# Altium PCB SHDN-IMD-S00-V00-IMDDaughter.PcbDoc
Units mm, origin at the board's own origin, x right, y up, seen from the top; angles counter-clockwise.
Board outline 55.68 x 59.75 mm, 2 copper layers (Top Layer, Bottom Layer); 69 components, 37 nets, 212 pads, 38 vias.
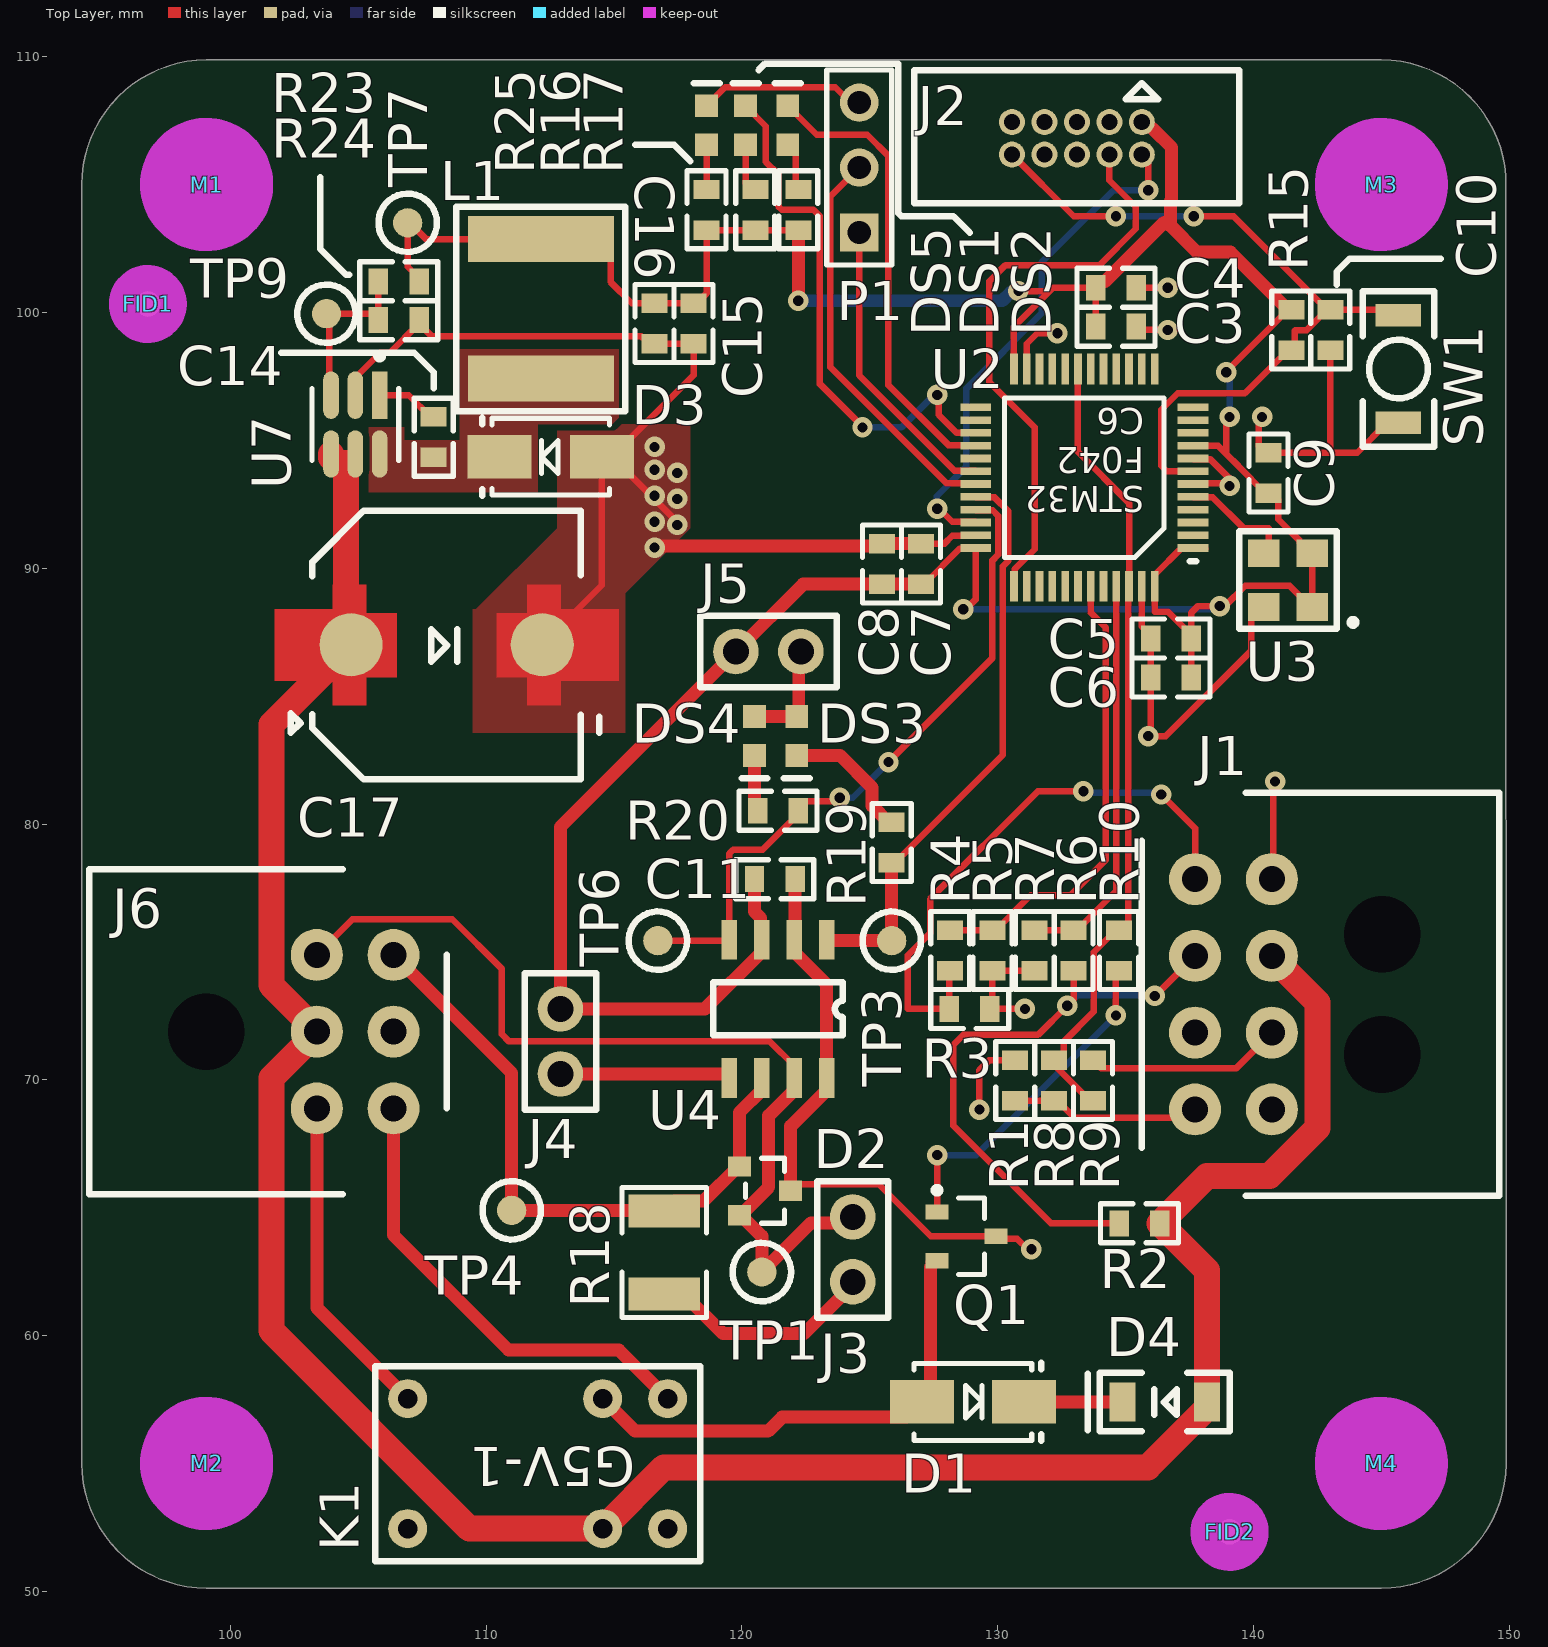
[diagram p0: Top Layer view]
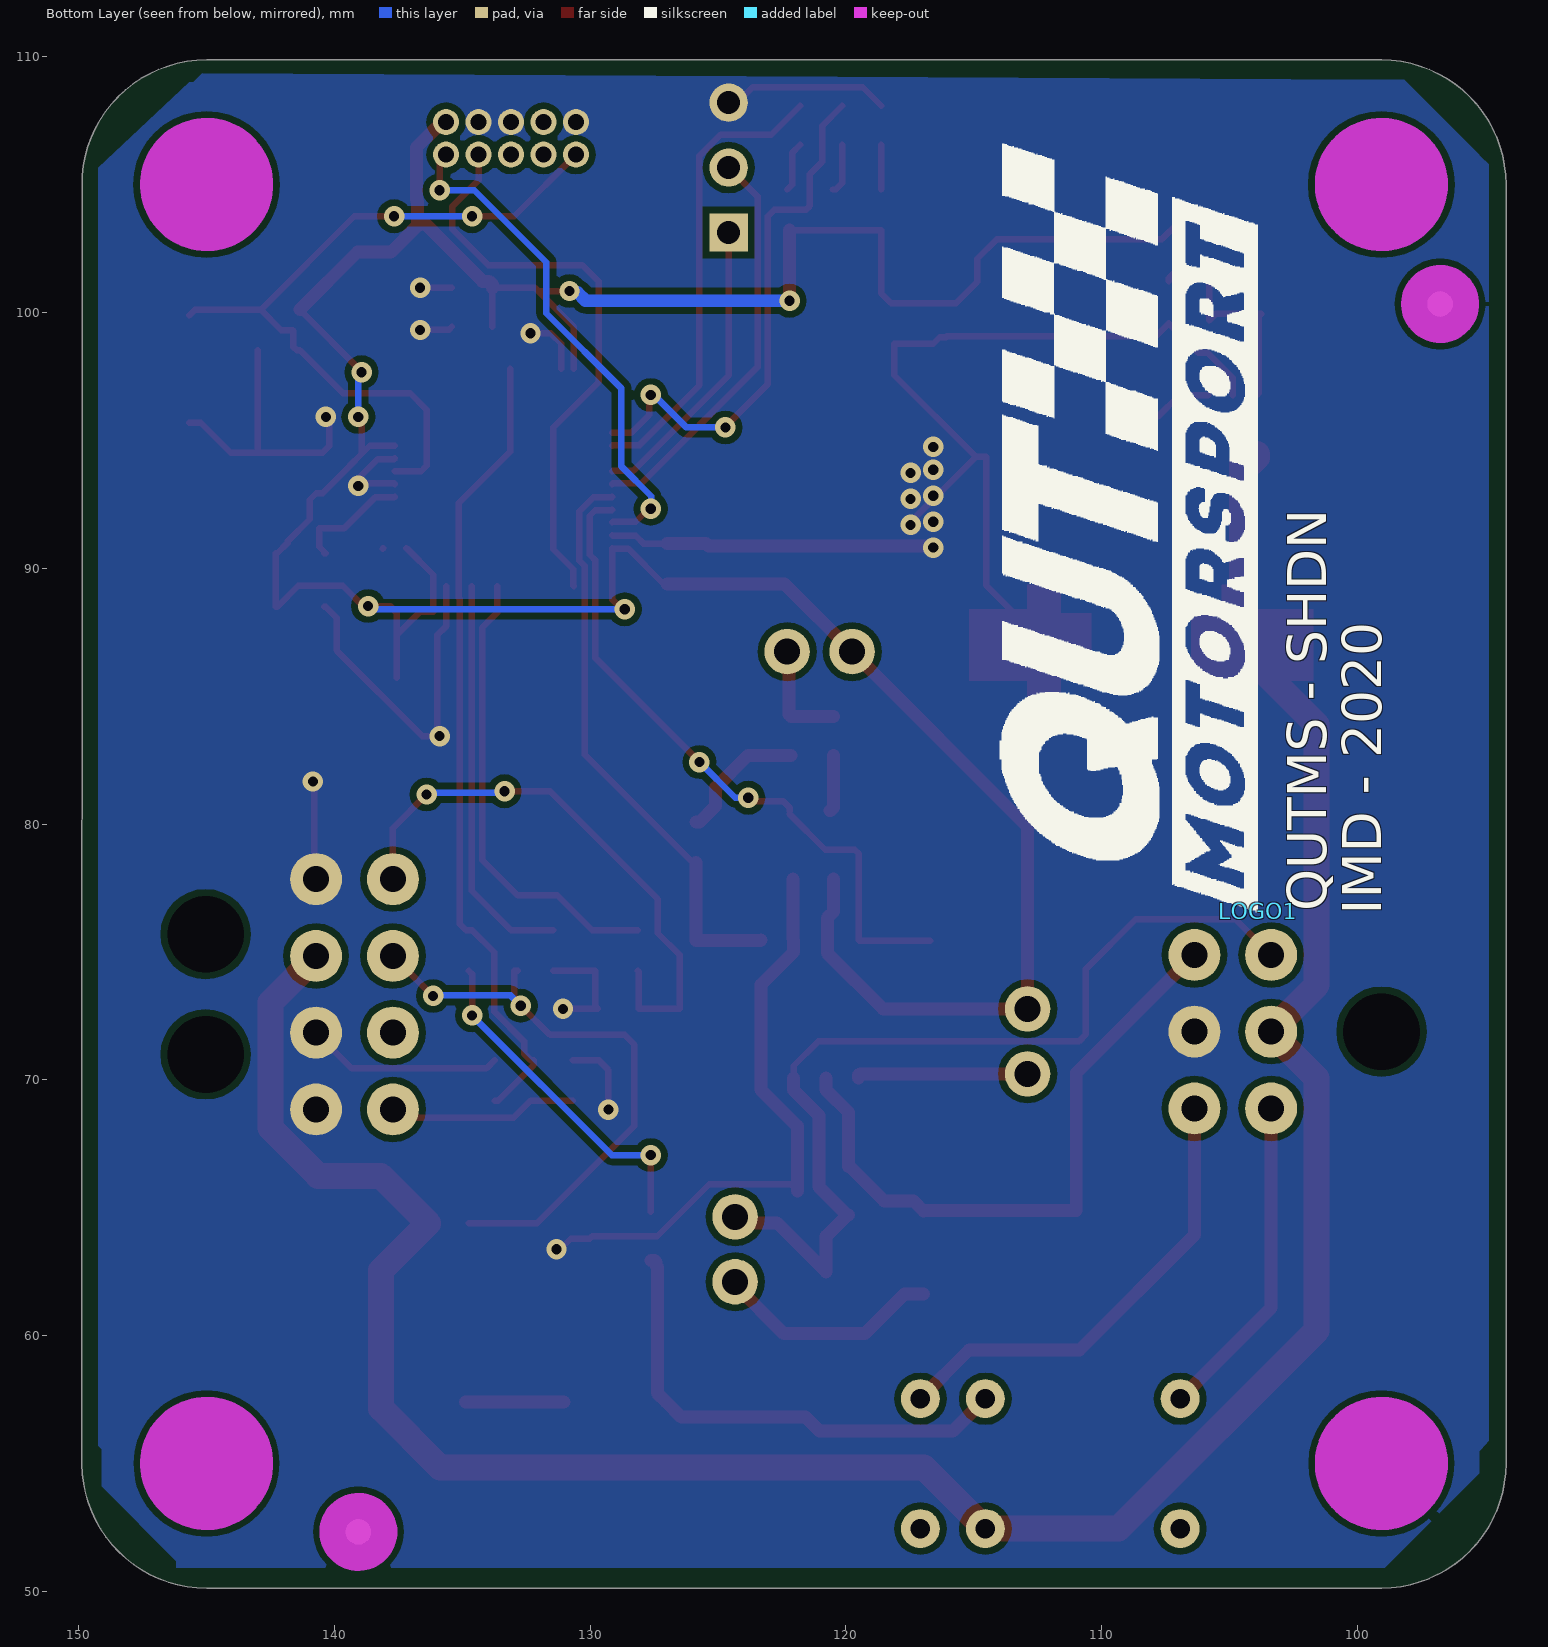
[diagram p1: Bottom Layer view, seen from below]
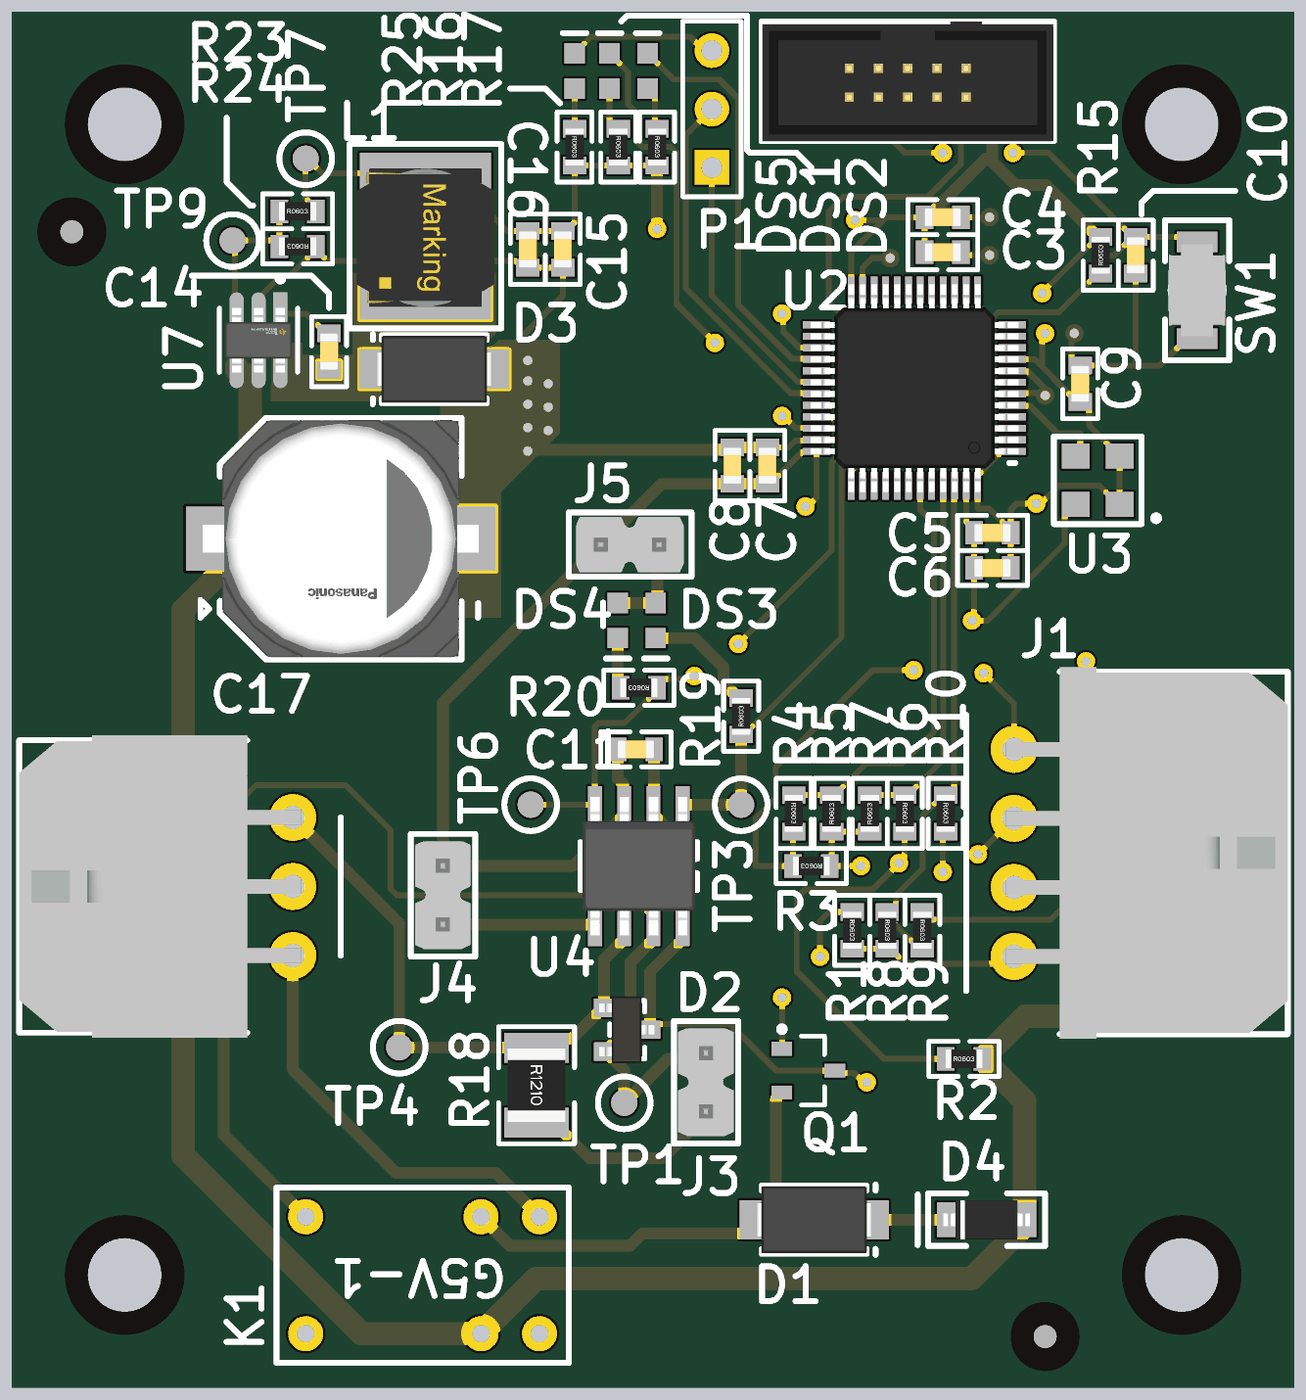
[diagram p2: 3D render of the assembled board from above, using the file's embedded part models]

## Layer stack, top to bottom
Top Solder: solder mask 0.0102, Solder Resist, Dk 3.5
Top Layer: signal copper 0.0356
Dielectric 1: dielectric 0.32, FR-4, Dk 4.8
Bottom Layer: signal copper 0.0356
Bottom Solder: solder mask 0.0102, Solder Resist, Dk 3.5

## Board outline
99.06,50.127 99.062,50.127 ccw(c99.069,55) 99.069,50.127 99.062,50.127 cw(c99.069,55) 94.196,55 94.196,105 cw(c99.069,105) 99.06,109.873 cw(c99.069,105) 99.069,109.873 ccw(c99.069,110) 99.07,109.873 145,109.873 ccw(c145,110) 145,109.873 cw(c145,105) 149.86,105.354 149.873,54.971 cw(c145,55) 145.001,50.127 cw(c145,55) 145,50.127 145.001,50.127

## Design rules (kind name [scope] priority, off if disabled: settings)
Clearance [All] p1: gap=0.254 ignorepadtopadclearanceinfootprint=FALSE except(0: Arc-SMDPad Arc-Hole Track-Hole SMDPad-Hole THPad-Hole Via-Hole Fill-Hole Poly-Hole Region-Hole Text-Hole; 0.152: Arc-Arc Arc-Track Track-Track Track-SMDPad SMDPad-SMDPad)
HoleSize [All] p1: absolutevalues=TRUE maxlimit=10 minlimit=0.025 maxpercent=80.000 minpercent=20.000
MinimumSolderMaskSliver [All] p1: minsoldermaskwidth=0
PolygonConnect [All] p1: connectstyle=Direct reliefconductorwidth=0.254 reliefentries=4 polygonreliefangle="90 Angle" airgapwidth=0.254
RoutingVias [All] p1: holewidth=0.4 width=0.8 viastyle="Through Hole" minholewidth=0.4 minwidth=0.8 maxholewidth=0.4 maxwidth=0.8
SilkToSilkClearance [All] p1: silktosilkclearance=0
SilkToSolderMaskClearance [IsPad] p1: minsilkscreentomaskgap=0.127 clearancetoexposedcopper=TRUE
SolderMaskExpansion [All] p1: expansion=0.102
Width [All] p1: maxlimit=1.016 minlimit=0.254 preferedwidth=0.508 minimp=50.000000 maximp=50.000000 favimp=50.000000
26 further rules are at their usual default settings.

## Classes and differential pairs
component class SHUTDOWN: D1 D4 K1 R10
component class SHDN-IMD-S01-V00-IMDDaughter: FID1 FID2 J6 LOGO1 M1 M2 M3 M4
component class "POWER SUPPLY": C14 C15 C16 C17 D3 DS5 L1 R23 R24 R25 TP7 TP9 U7
component class MICROCONTROLLER: C3 C4 C5 C6 C7 C8 C9 C10 DS1 DS2 J2 P1 R15 R16 R17 SW1 U2 U3
component class IMD: J1 R1 R2 R3 R4 R5 R6 R7 R8 R9
component class CANBUS: C11 D2 DS3 DS4 J3 J4 J5 R18 R19 R20 TP1 TP3 TP4 TP6 U4

## Components (designator, comment, footprint, x,y, rotation, side; value= is the part's Value field where it differs from the comment)
C3 "100nF" Cap_Ceramic_0603 134.62,99.441 r180 top
C4 "4u7" Cap_Ceramic_0603 134.62,100.965 r180 top
C5 "100nF" Cap_Ceramic_0603 136.779,87.249 r0 top
C6 "4u7" Cap_Ceramic_0603 136.779,85.725 r0 top
C7 "100nF" Cap_Ceramic_0603 127,90.17 r270 top
C8 "4u7" Cap_Ceramic_0603 125.476,90.17 r270 top
C9 "100nF" Cap_Ceramic_0603 140.589,93.726 r270 top
C10 "100nF" Cap_Ceramic_0603 143.002,99.314 r90 top
C11 "100nF" Cap_Ceramic_0603 121.285,77.842 r0 top
C14 "100nF 100V 5% X7R 0603" Cap_Ceramic_0603 107.95,95.123 r270 top
C15 "47uF 16V 1210" Cap_Ceramic_0603 118.11,99.568 r90 top
C16 "47uF 16V 1210" Cap_Ceramic_0603 116.586,99.568 r90 top
C17 "47uF 80V 10% AluPoly 10x10mm" CAP_ALU_10x10mm 108.458,86.995 r180 top
D1 "1N4448WQ-7-F" SMA 129.032,57.404 r0 top
D2 "NUP2105L" NUP2105L 120.904,65.659 r270 top
D3 "B260A-13-F" SMA 112.522,94.361 r180 top
D4 "BZT52C5V6-7-F" SOD123 136.525,57.404 r180 top
DS1 "LED Orange" "LED ORANGE 0603" 120.142,107.315 r90 top
DS2 "LED Orange" "LED ORANGE 0603" 121.793,107.315 r90 top
DS3 "LED Blue 0603" "LED BLUE 0603" 122.143,83.439 r270 top
DS4 "LED Blue 0603" "LED BLUE 0603" 120.492,83.439 r270 top
DS5 "LED Green 0603" "LED GREEN 0603" 118.618,107.315 r90 top
FID1 "Fiducial 1MM" "FIDUCIAL 1MM" 96.774,100.33 r0 top
FID2 "Fiducial 1MM" "FIDUCIAL 1MM" 139.065,52.324 r90 top
J1 "Microfit 3.0 2x4" Microfit_2X4_R_TH 145.034,73.342 r90 top
J2 "IDC 10P 2x5 1.27mm" "IDC 1.27MM 10P" 133.096,106.807 r180 top
J3 "Jumper 2Way Pins" Jumper_2Way_Pin 124.333,62.103 r270 top
J4 "Jumper 2Way Pins" Jumper_2Way_Pin 112.903,70.231 r270 top
J5 "Jumper 2Way Pins" Jumper_2Way_Pin 122.301,86.741 r0 top
J6 "Microfit 3.0 2x3" Microfit_2X3_R_TH 99.06,71.882 r270 top
K1 "G5V-1-DC12" G5V-1 112.014,54.991 r180 top
L1 "74404064221" Inductor_6x6mm 112.141,100.076 r90 top
LOGO1 "30mm Wide QUTMS Logo" "QUTMS LOGO 30MM" 103.886,76.581 r90 bottom
M1 "Hole M3 Tight Unplated" "M3.2 UNPLATED" 99.069,105 r0 top
M2 "Hole M3 Tight Unplated" "M3.2 UNPLATED" 99.069,55 r0 top
M3 "Hole M3 Tight Unplated" "M3.2 UNPLATED" 145,105 r0 top
M4 "Hole M3 Tight Unplated" "M3.2 UNPLATED" 145,55 r0 top
P1 "UART" HDR1X3 124.587,103.124 r90 top
Q1 "BST82,215" PMV15UNEAR 128.778,63.881 r0 top
R1 "2k2" Res_ThinFilm_0603 130.683,69.977 r270 top
R2 "2k2" Res_ThinFilm_0603 135.54,64.389 r0 top
R3 "2k2" Res_ThinFilm_0603 128.905,72.771 r180 top
R4 "10k" Res_ThinFilm_0603 128.143,75.057 r270 top
R5 "3k9" Res_ThinFilm_0603 129.794,75.057 r90 top
R6 "10k" Res_ThinFilm_0603 132.969,75.057 r270 top
R7 "3k9" Res_ThinFilm_0603 131.445,75.057 r90 top
R8 "10k" Res_ThinFilm_0603 132.207,69.977 r270 top
R9 "3k9" Res_ThinFilm_0603 133.731,69.977 r270 top
R10 "1K" Res_ThinFilm_0603 134.747,75.057 r270 top
R15 "4k7" Res_ThinFilm_0603 141.478,99.314 r90 top
R16 "330R" Res_ThinFilm_0603 120.523,104.013 r270 top
R17 "330R" Res_ThinFilm_0603 122.205,104.013 r270 top
R18 "120R 1% 1210" Res_ThinFilm_1210 116.967,63.246 r270 top
R19 "330R" Res_ThinFilm_0603 125.857,79.279 r90 top
R20 "330R" Res_ThinFilm_0603 121.412,80.518 r180 top
R23 "64k9 1%" Res_ThinFilm_0603 106.584,101.219 r0 top
R24 "19k6 1%" Res_ThinFilm_0603 106.584,99.695 r180 top
R25 "1k 5% 0603" Res_ThinFilm_0603 118.618,104.013 r270 top
SW1 "B3U-1000P" "BTN B3U-1000P" 145.669,97.79 r90 top
TP1 "TestPoint_SMD" TestPointSMD 120.777,62.484 r90 top
TP3 "TestPoint_SMD" TestPointSMD 125.857,75.438 r90 top
TP4 "TestPoint_SMD" TestPointSMD 110.998,64.897 r90 top
TP6 "TestPoint_SMD" TestPointSMD 116.713,75.438 r90 top
TP7 "TestPoint_SMD" TestPointSMD 106.934,103.505 r90 top
TP9 "TestPoint_SMD" TestPointSMD 103.759,99.949 r90 top
U2 "STM32F042C6" STM32F042C6 137.636,90.79 r180 top
U3 "DSC1001DI1-008.0000T" DSC1001DI1-008.0000TCT-ND 141.351,89.535 r180 top
U4 "SN65HVD233" SN65HVD233DR 121.412,72.771 r270 top
U7 "LMR14010" LMR14010 104.902,95.631 r270 top

## Footprints (in the part's own frame and the unit in brackets; to place one, negate y for a bottom-side part, rotate by r counter-clockwise, add the part's x,y. Pads: shape width x height; smd on the part's side, far side on the other; paste and mask are expansions set on the pad)
"BTN B3U-1000P" [mil] "OMRON B3U-1000P"
  rect 35x70 smd: 1(-82.68,0) 2(82.68,0)
  silkscreen extent -120,-55 120,55, body extent -79,-49 79,49, height 63
CAP_ALU_10x10mm [mm]
  round 2.466 smd paste+0 mask+0: A(3.738,-0.013) K(-3.737,-0.013)
  Top Layer region: 1.951,-1.25 1.951,1.25 3.151,1.25 3.151,2.35 4.451,2.35 4.451,1.397 6.731,1.397 6.731,-1.397 4.451,-1.397 4.451,-2.35 3.151,-2.35 3.151,-1.25
  Top Layer region: -1.949,-1.25 -1.949,1.25 -3.149,1.25 -3.149,2.35 -4.449,2.35 -4.449,1.397 -6.731,1.397 -6.731,-1.397 -4.449,-1.397 -4.449,-2.35 -3.149,-2.35 -3.149,-1.25
  silkscreen extent -5.97,-5.25 6.1,5.25, body extent -6.6,-5.5 6.6,5.5, height 0.25
Cap_Ceramic_0603 [mil]
  rect 30x40 smd: 1(-31.24,0) 2(31.24,0)
  silkscreen extent -60,-30 60,30, body extent -31,-16 32,16, height 33
DSC1001DI1-008.0000TCT-ND [mm]
  rect 1.219x1.092 smd: 1(-0.95,1.05) 2(0.95,1.05) 3(0.95,-1.05) 4(-0.95,-1.05)
  silkscreen extent -2.67,-1.91 1.91,1.91, body extent -1.25,-1.6 1.25,1.6, height 0.85
"FIDUCIAL 1MM" [mm]
  round 1 smd mask+1: 1(0,0)
  round 1 smd far side mask+1: 1(0,0)
  Keep-Out Layer circle w1.524: c0,0 r0.762
G5V-1 [mil]
  round 60 hole 30: 1(-200,100) 2(-100,100) 5(200,100) 6(200,-100) 9(-100,-100) 10(-200,-100)
  silkscreen extent -250,-150 250,150, body extent -242,-148 250,148, height 394
HDR1X3 [mm] "Connector; Header; 3 Position"
  rect 1.5x1.5 hole 0.9: 1(0,0)
  round 1.5 hole 0.9: 2(2.54,0) 3(5.08,0)
  silkscreen extent -1.27,-1.27 6.35,1.27
"IDC 1.27MM 10P" [mil]
  round 40 hole 25: 1(-100,-25) 2(-100,25) 3(-50,-25) 4(-50,25) 5(0,-25) 6(0,25) 7(50,-25) 8(50,25) 9(100,-25) 10(100,25)
  silkscreen extent -250,-105 250,100, body extent -249,-104 249,100, height 214
Inductor_6x6mm [mm]
  rect 1.8x5.7 smd: 1(-2.667,0) 2(2.794,0)
  silkscreen extent -3.94,-3.3 4.06,3.3, body extent -3,-3 3,3, height 4.56
Jumper_2Way_Pin [mil]
  round 70 hole 40: 1(-100,0) 2(0,0)
  silkscreen extent -155,-55 55,55, body extent -142,-48 42,47, height 332
"LED BLUE 0603" [mil]
  rect 35x35 smd: 1(-30,0) 2(30,0)
  silkscreen extent 65,-20 65,20, body extent -40,-20 40,20, height 30
"LED GREEN 0603" [mil]
  rect 35x35 smd: 1(-30,0) 2(30,0)
  silkscreen extent 65,-20 65,20, body extent -40,-20 40,20, height 30
"LED ORANGE 0603" [mil]
  rect 35x35 smd: 1(-30,0) 2(30,0)
  silkscreen extent 65,-20 65,20, body extent -40,-20 40,20, height 30
LMR14010 [mm]
  rect 1.854x0.612 smd paste+0 mask+0: 1(-1.136,0.933)
  rrect100% 1.854x0.612 smd paste+0 mask+0: 2(-1.136,-0.017) 3(-1.136,-0.967) 4(1.164,-0.967) 5(1.164,-0.017) 6(1.164,0.933)
  silkscreen extent -2.79,-1.72 1.41,1.68, body extent -2.56,-1.97 2.59,1.93, height 0.25
"M3.2 UNPLATED" [mm]
  round 0 hole 3.2 unplated mask+2.6: 1(0,0)
  Keep-Out Layer circle w2.667: c0,0 r1.27
Microfit_2X3_R_TH [mil]
  round 80 hole 40: 1(118.11,170) 2(0,170) 3(-118.11,170) 4(118.11,288.19) 5(0,288.19) 6(-118.11,288.19)
  round 0 hole 118.11 mask+10: NC(0,0)
  silkscreen extent -250,-180 250,370, body extent -259,-180 259,302, height 350
Microfit_2X4_R_TH [mil]
  round 80 hole 40: 1(177.17,170) 2(59.06,170) 3(-59.06,170) 4(-177.17,170) 5(177.17,288.19) 6(59.06,288.19) 7(-59.06,288.19) 8(-177.17,288.19)
  round 0 hole 118.11 mask+10: NC(-92.52,0) NC(92.52,0)
  silkscreen extent -310,-180 310,370, body extent -318,-180 318,302, height 350
NUP2105L [mm]
  rect 0.8x0.9 smd: 1(-0.95,-1) 2(0.95,-1) 3(0,1)
  silkscreen extent -1.27,-0.76 1.27,0.76, body extent -1.45,-1.22 1.45,1.18, height 1
PMV15UNEAR [mm] "SOT23, 3-Leads, Body 2.90x2.30mm, Pitch 0.95mm, IPC Medium Density"
  rect 0.9x0.6 smd: D(1.15,0) G(-1.15,0.95) S(-1.15,-0.95)
  silkscreen extent -1.27,-1.5 0.7,1.92, body extent -0.7,-1.5 0.7,1.5, height 1.1
"QUTMS LOGO 30MM" [mm]
  silkscreen extent -0.03,0.03 30.02,10.1
Res_ThinFilm_0603 [mil]
  rect 30x40 smd: 1(-31.24,0) 2(31.24,0)
  silkscreen extent -60,-30 60,30, body extent -31,-16 32,16, height 18
Res_ThinFilm_1210 [mm]
  rect 1.3x2.8 smd: 1(-1.625,0) 2(1.625,0)
  silkscreen extent -2.54,-1.65 2.54,1.65, body extent -1.6,-1.25 1.6,1.25, height 0.6
SMA [mm]
  rect 2.5x1.7 smd: A(-2,0) K(2,0)
  silkscreen extent -2.3,-1.52 2.67,1.52, body extent -2.52,-1.46 2.52,1.46, height 2.4
SN65HVD233DR [mm]
  rect 1.55x0.6 smd: 1(-2.7,1.903) 2(-2.7,0.633) 3(-2.7,-0.637) 4(-2.7,-1.907) 5(2.7,-1.907) 6(2.7,-0.637) 7(2.7,0.633) 8(2.7,1.903)
  silkscreen extent -1.04,-2.54 1.04,2.54, body extent -3.01,-2.45 3.01,2.45, height 1.63
SOD123 [mil]
  rect 40x60 smd: A(-65,0) K(65,0)
  silkscreen extent -100,-45 118,45, body extent -74,-33 74,33, height 47
STM32F042C6 [mm]
  rect 1.2x0.3 smd: 1(0,0) 2(0,-0.5) 3(0,-1) 4(0,-1.5) 5(0,-2) 6(0,-2.5) 7(0,-3) 8(0,-3.5) 9(0,-4) 10(0,-4.5) 11(0,-5) 12(0,-5.5) 25(8.5,-5.5) 26(8.5,-5) 27(8.5,-4.5) 28(8.5,-4) 29(8.5,-3.5) 30(8.5,-3) 31(8.5,-2.5) 32(8.5,-2) 33(8.5,-1.5) 34(8.5,-1) 35(8.5,-0.5) 36(8.5,0)
  rect 0.3x1.2 smd: 13(1.5,-7) 14(2,-7) 15(2.5,-7) 16(3,-7) 17(3.5,-7) 18(4,-7) 19(4.5,-7) 20(5,-7) 21(5.5,-7) 22(6,-7) 23(6.5,-7) 24(7,-7) 37(7,1.5) 38(6.5,1.5) 39(6,1.5) 40(5.5,1.5) 41(5,1.5) 42(4.5,1.5) 43(4,1.5) 44(3.5,1.5) 45(3,1.5) 46(2.5,1.5) 47(2,1.5) 48(1.5,1.5)
  silkscreen extent -0.13,-5.86 7.36,0.51, body extent -0.27,-7.26 8.76,1.77, height 1.5
TestPointSMD [mil]
  round 45 smd: 1(0,0)
  silkscreen extent -45,-45 45,45

## Part data
C3 C5 C7 C11: library part "100nF 100V 5% X7R 0603", "Capacitor, Ceramic, SMD, 100nF, 100V, 5%, X7R, 0603"
C4 C6 C8: library part "4u7 50V 5% X7R 0603", "Capacitor, Ceramic, SMD, 4u7, 50V, 5%, X7R, 0603"
C9 C10: library part "100nF 50V 5% X7R 0603", "Capacitor, Ceramic, SMD, 100nF, 50V, 5%, X7R, 0603"
C14: "Capacitor, Ceramic, SMD, 100nF, 100V, 5%, X7R, 0603"
C15 C16: library part "47uF 16V 10% X7R 1210", "Capacitor, Ceramic, SMD, 47uF, 16V, 5%, X7R, 1210"
C17: "Capacitor, AluPoly, SMD, 47uF, 80V, 10%, AluPoly, 10x10mm"
D1: "Diode, SMD, 75V, 5%, 250mA, SOD123", Average Rectified Current=150mA, Forward Voltage=1V, Manufacturer="ON Semiconductor / Fairchild", Manufacturer Part Number=1N914BWS, Max Forward Surge Current (Ifsm)=4A, Max Operating Temperature=150°C, Max Repetitive Reverse Voltage (Vrrm)=75V, Max Reverse Leakage Current=5uA, Min Operating Temperature=-55°C, Package Quantity=1, Power Dissipation=200mW, Category="Rectifier Diodes", Contact Plating=Tin,Matte, Element Configuration=Single, Forward Current=150mA, Height=1mm, Lead Free="Lead Free", Length=1.8mm, Max Reverse Voltage (DC)=75V, Mount="Surface Mount", Number of Pins=2, Packaging="Tape and Reel", Peak Reverse Current=5uA, Radiation Hardening=No, REACH SVHC="No SVHC", Recovery Time=4ns, Reverse Recovery Time=4ns, Reverse Voltage=75V, Weight=0.0276g, Width=1.35mm
D3: "Diode, Schottky Barrier Rectifier, 60 V, 2 A, B260A-13-F"
D4: "Diode, SMD, Zender, 5.6V, 7%, 500mW, SOD-123", Manufacturer=Generic, MPN="1.8V 500mW"
DS1 DS2: library part "LED ORANGE 0603"
DS3 DS4: library part "LED BLUE 0603"
J1: library part Microfit_2x4
J3 J4 J5: library part "Jumper 2Way Side Pins", "Jumper 2Way Side Pins"
J6: library part Microfit_2x3
K1: "General Purpose Relay SPDT (1 Form C) Through Hole, 12V, 2A"
L1: "FIXED IND 220UH 660MA 850 MOHM", ComponentLink1Description=Digikey, ComponentLink1URL=https://www.digikey.com.au/product-detail/en/w%C3%BCrth-elektronik/74404064221/732-7261-1-ND/5353241, ComponentLink2Description="LCSC A", ComponentLink2URL=https://lcsc.com/product-detail/Power-Inductors_Sunlord-SWPA6045S221MT_C91047.html, ComponentLink3Description="LCSC B", ComponentLink3URL=https://lcsc.com/product-detail/Power-Inductors_SXN-Shun-Xiang-Nuo-Elec-SMNR6045-221MT_C467145.html
LOGO1: library part "QUTMS Logo 30mm"
M1 M2 M3 M4: "M3.2 Hole, No Plating"
P1: library part "Header 3", "Header, 3-Pin", LatestRevisionDate=17-Jul-2002, LatestRevisionNote="Re-released for DXP Platform.", Publisher="Altium Limited"
Q1: library part PMV15UNEAR, "MOSFET N-CH 100V 190MA SOT-23", Manufacturer=Nexperia
R1 R2 R3: library part "2k2 5% 0603", "Resistor, SMD, 2k2, 0.1W, 5%, 0603"
R4 R6 R8: library part "10k 1% 0603", "Resistor, SMD, 10k, 0.1W, 1%, 0603"
R5 R7 R9: library part "3k9 5% 0603", "Resistor, SMD, 3k9, 0.1W, 5%, 0603"
R10: library part "1k 5% 0603", "Resistor, SMD, 1k, 0.1W, 5%, 0603"
R15: library part "4k7 5% 0603", "Resistor, SMD, 4k7, 0.1W, 5%, 0603"
R16 R17 R19 R20: library part "330R 5% 0603", "Resistor, SMD, 330R, 0.1W, 5%, 0603"
R18: "Resistor, SMD, 120R, 0.25W, 1%, 1210"
R23: library part "64k9 1% 0603", "Resistor, SMD, 64k9, 0.1W, 5%, 0603"
R24: library part "19k6 1% 0603", "Resistor, SMD, 19k6, 0.1W, 5%, 0603"
R25: "Resistor, SMD, 1k, 0.1W, 5%, 0603"
SW1: library part "BTN B3U-1000P", "Omron B3U-1000P Ultra Miniture Switch", ComponentLink1Description=LCSC, ComponentLink1URL=https://lcsc.com/product-detail/Tactile-Switches_BRIGHT-TSA063G50-250_C294565.html
U2: library part STM32042C6, "ARM® Cortex®-M0 STM32F0 Microcontroller IC 32-Bit 48MHz 32KB (32K x 8) FLASH 48-LQFP (7x7)", ComponentLink1Description=Digikey, ComponentLink1URL=https://www.digikey.com.au/product-detail/en/stmicroelectronics/STM32F042C6T6TR/497-19319-1-ND/10063344, ComponentLink2Description=Datasheet, ComponentLink2URL=https://www.st.com/resource/en/datasheet/stm32f042k6.pdf
U3: "on 8MHz XO (Standard) CMOS Oscillator 1.8 ~ 3.3V Standby (Power Down) 4-SMD, No Lead"
D2: ComponentLink1Description=Datasheet, ComponentLink1URL=https://www.onsemi.cn/PowerSolutions/document/NUP2105L-D.PDF, ComponentLink2Description=LCSC, ComponentLink2URL=https://lcsc.com/product-detail/TVS_ON-Semiconductor-NUP2105LT1G_C14486.html, ComponentLink3Description=Digikey, ComponentLink3URL=https://www.digikey.com.au/product-detail/en/on-semiconductor/SZNUP2105LT1G/SZNUP2105LT1GOSCT-ND/3487669
U4: ComponentLink1Description=LCSC, ComponentLink1URL=https://lcsc.com/product-detail/CAN-ICs_Texas-Instruments_SN65HVD233DRG4_Texas-Instruments-Texas-Instruments-SN65HVD233DRG4_C61643.html, ComponentLink2Description=Digikey, ComponentLink2URL=https://www.digikey.com.au/product-detail/en/texas-instruments/SN65HVD233DR/296-35967-1-ND/4134960, ComponentLink3Description=Datasheet, ComponentLink3URL=https://www.ti.com/lit/ds/symlink/sn65hvd233.pdf?ts=1588560888178, ComponentLink4Description="Ti Product Page", ComponentLink4URL=https://www.ti.com/product/SN65HVD233

## Via types
v1: diameter 0.8, hole 0.4, Top Layer to Bottom Layer, 25 vias
v2: diameter 0.8, hole 0.4, Top Layer to Bottom Layer, tented both sides, 13 vias

## Nets (pads, with @x,y where several pads share a name; then routed paths per layer and width w, separated by ;. In a path a pad name is that pad's centre, name@x,y a point inside that pad or via, vN(x,y) a via of type N, cw(c..) or ccw(c..) an arc to the next point about the centre after c; other vN are vias at no path point)
3V3: C3.2 C4.2 C5.2 C6.2 C7.2 C8.2 C9.2 C11.1 C15.2 C16.2 J2.1 J4.1 J5.1 L1.2 R15.2 R16.2 R17.2 R23.2 R25.2 TP7.1 U2.1 U2.9 U2.24 U2.36 U2.48 U3.1 U3.4 U4.3 | length 137.4
  Top Layer w0.254: R23.2 107.378,101.346 106.934,101.79 TP7.1 107.011,103.505 107.646,102.87 L1.2 114.091,102.87 114.864,102.097 114.864,101.194 115.697,100.361 C16.2 C15.2 118.237,100.361 118.618,100.742 R25.2 R16.2 R17.2 ; C7.2 127.127,89.377 128.517,90.767 129.113,90.767 U2.36 129.136,88.773 128.755,88.392 v1(128.651,88.392) ; U2.24 130.636,99.441 132.033,100.838 ; v1(130.81,100.838) 132.033,100.838 ; C3.2 C4.2 132.16,100.965 132.033,100.838 ; U2.1@137.186,90.79 136.136,89.74 U2.48 136.136,88.304 136.644,88.304 C5.2@137.572,87.376 ; C6.2 C5.2 C5.2@137.572,87.376 ; U2.9 138.617,94.79 138.929,94.479 ; U2.1@138.086,90.79 U2.1@138.109,90.767 ; v1(138.938,97.663) 138.938,97.694 141.351,100.107 R15.2 ; v1(139.065,95.916) 138.929,95.78 138.929,94.479 ; C5.2@137.572,87.376 137.572,88.265 137.826,88.519 v1(138.684,88.519) 138.884,88.519 139.676,89.31 141.412,89.31 142.238,88.485 U3.1 U3.4 142.238,90.585 141.818,91.004 141.818,91.068 140.97,91.916 140.97,92.679 140.716,92.933 C9.2 140.462,92.933 139.412,93.982 139.412,93.995 138.929,94.479
  Top Layer w0.508: C11.1 120.492,76.572 120.729,76.334 120.729,74.95 118.551,72.771 J4.1 112.903,79.883 J5.1 122.397,89.377 C8.2 C7.2 ; v1(122.205,100.457) R17.2 ; C4.2 133.827,101.092 133.954,101.219 134.204,101.219 136.507,103.523 ; J2.1 135.773,107.442 136.027,107.188 136.057,107.188 136.798,106.447 136.798,104.399 136.76,104.361 136.76,103.383 137.781,102.362 139.096,102.362 R15.2@141.351,100.107
  Bottom Layer w0.254: v1(128.651,88.392) 138.557,88.392 v1(138.684,88.519) ; v1(138.938,97.663) 139.065,97.536 v1(139.065,95.916)
  Bottom Layer w0.508: v1(122.205,100.457) 130.175,100.457 130.5,100.782 130.754,100.782 v1(130.81,100.838)
+12: C17.A D4.A J1.2 J6.2 K1.2 R2.2 U7.4 U7.5 | length 102.6
  Top Layer w1.016: U7.4 103.935,94.323 104.137,94.121 104.521,94.121 C17.A@104.521,87.206 ; C17.A C17.A@104.521,87.206 ; J1.2 140.716,74.806 142.494,73.028 142.494,68.106 140.636,66.247 138.192,66.247 R2.2 138.176,62.547 D4.A 138.176,57.15 135.875,54.849 116.952,54.849 K1.2 109.347,52.451 101.6,60.198 101.6,70.068 103.378,71.846 J6.2 103.378,71.918 101.6,73.696 101.6,83.888 104.521,86.809 C17.A@104.521,87.206
"CAN H": D2.2 J3.1 J6.3 TP1.1 U4.7 | length 36.9
  Top Layer w0.254: J6.3 104.775,76.279 108.672,76.279 110.617,74.334 110.617,71.777 110.893,71.501 121.09,71.501 122.045,70.546 U4.7
  Top Layer w0.508: D2.2 D2.2@119.954,64.709 ; U4.7 122.045,69.596 121.048,68.598 121.048,65.803 D2.2@119.954,64.709 ; J3.1 124.09,64.4 122.693,64.4 TP1.1 120.777,63.886 D2.2@119.954,64.709
"CAN L": D2.1 J6.6 R18.1 TP4.1 U4.6 | length 25.4
  Top Layer w0.508: J6.6 110.998,70.264 TP4.1 111.011,64.884 116.954,64.884 R18.1 117.363,65.267 118.512,65.267 119.854,66.609 D2.1 119.904,68.724 120.775,69.596 U4.6
"CAN LBK": J4.2 U4.5 | length 6.7
  Top Layer w0.508: J4.2 119.459,70.231 119.505,70.185 U4.5
"CAN LED": DS3.1 DS4.1 J5.2 | length 4.3
  Top Layer w0.508: DS4.1 DS3.1 122.222,84.28 122.222,86.662 J5.2
"CAN RX": R20.1 TP6.1 U2.33 U4.4 | length 26.3
  Top Layer w0.254: TP6.1 119.473,75.438 U4.4 119.505,78.845 119.654,78.994 120.808,78.994 R20.1@122.205,80.391 ; R20.1 122.205,80.645 122.459,80.899 123.55,80.899 123.677,81.026 v1(123.825,81.026) ; v1(125.73,82.423) 129.794,86.487 129.794,90.303 130.015,90.524 130.015,92.056 129.804,92.267 129.159,92.267 U2.33
  Bottom Layer w0.254: v1(123.825,81.026) 124.333,81.026 v1(125.73,82.423)
"CAN RX LED": DS4.2 R20.2 | length 2.2
  Top Layer w0.508: DS4.2 120.492,80.645 R20.2
"CAN TX": R19.1 TP3.1 U2.32 U4.1 | length 22.8
  Top Layer w0.254: R19.1 125.984,78.486 130.207,82.709 130.207,90.08 130.422,90.296 130.422,92.224 129.879,92.767 129.159,92.767 U2.32
  Top Layer w0.508: U4.1 123.348,75.438 TP3.1 R19.1
"CAN TX LED": DS3.2 R19.2 | length 5.2
  Top Layer w0.508: DS3.2 123.839,82.677 125.095,81.421 125.095,80.708 125.73,80.073 R19.2
GND: C3.1 C4.1 C5.1 C6.1 C7.1 C8.1 C9.1 C10.1 C11.2 C15.1 C16.1 C17.K D2.3 D3.A DS5.2 J1.1 J1.3 J1.4 J2.3 J2.5 J2.9 J6.5 P1.3 Q1.D R1.1 R3.1 R5.1 R7.1 R9.1 R24.1 SW1.1 U2.6 U2.8 U2.23 U2.35 U2.47 U3.2 U4.2 U4.8 U7.2 | length 129.3
  Top Layer w0.254: U7.2 104.885,97.446 105.864,98.424 106.234,98.424 107.378,99.568 107.886,99.06 116.056,99.06 116.088,99.029 116.332,99.029 C16.1 C15.1 118.11,97.549 D3.A@114.922,94.361 ; C17.K 114.522,89.335 D3.A D3.A@114.922,94.361 ; v2(117.475,91.694) 117.475,91.808 D3.A@114.922,94.361 ; DS5.2 119.342,108.801 123.653,108.801 124.25,108.204 P1.3 ; D2.3 122.158,65.913 125.349,65.913 127.381,63.881 Q1.D 130.025,63.784 130.759,63.784 131.17,63.373 v1(131.318,63.373) ; C7.1 127.92,90.963 128.224,91.267 129.113,91.267 U2.35 ; v1(129.286,68.834) 129.286,70.381 129.675,70.77 R1.1 ; v1(131.064,72.771) R3.1 129.794,72.867 R5.1 R7.1 ; U2.23 131.136,98.775 131.548,99.187 v2(132.334,99.187) ; R9.1 134.056,70.445 139.319,70.445 J1.3 ; C3.1 135.54,99.314 v2(136.652,99.314) ; C4.1 v2(136.652,100.965) ; U2.47 135.636,87.726 135.986,87.376 C5.1 C6.1 135.986,83.535 v1(135.89,83.439) 136.571,83.439 139.918,86.787 139.918,88.066 140.337,88.485 U3.2 ; U2.6 137.659,93.313 v2@139.004,93.313 ; U2.8 137.659,94.267 138.304,94.267 139.065,93.506 138.938,93.379 v2@139.004,93.313 ; v2(140.335,95.916) 140.208,95.789 140.208,94.773 140.462,94.519 C9.1 143.076,94.519 ; J1.1 140.779,77.906 140.779,81.597 v1(140.843,81.661) ; C10.1 143.002,94.594 143.076,94.519 ; SW1.1 145.225,95.69 144.054,94.519 143.076,94.519 ; v2@139.004,93.313 139.033,93.313 v2@139.019,93.299 ; v2@139.004,93.313 v2@139.019,93.299 ; v2@139.019,93.299 138.948,93.228 138.958,93.218 v2(139.065,93.218) 139.065,93.252 v2@139.019,93.299
  Top Layer w0.508: v2(116.586,90.805) 116.642,90.861 125.373,90.861 C8.1 C7.1 ; D2.3 121.904,68.184 123.315,69.596 U4.8 123.315,73.726 122.045,74.996 U4.2 122.078,75.504 C11.2 ; J2.9 J2.9@130.653,107.539 ; J2.5 J2.5@133.096,107.579
  other v2: 116.586,91.821 117.475,92.71 116.586,92.837 117.475,93.726 116.586,93.853 116.586,94.742
"IMD M": J1.5 R3.2 R4.2 | length 22.5
  Top Layer w0.254: R4.2 128.112,74.232 R3.2 126.492,72.771 126.492,74.87 127.356,75.733 127.356,77.064 131.572,81.28 v1(133.35,81.28) ; v1(136.398,81.153) 137.714,79.837 J1.5
  Bottom Layer w0.254: v1(133.35,81.28) 133.413,81.216 136.334,81.216 v1(136.398,81.153)
"IMD MEAS LOW": R6.1 R7.2 U2.45 | length 15.7
  Top Layer w0.254: R7.2 R6.1 133.096,75.85 134.636,77.39 U2.45
"IMD MEASUREMENT": R4.1 R5.2 U2.43 | length 18.2
  Top Layer w0.254: R4.1 R5.2 129.921,75.85 131.287,77.216 132.842,77.216 134.23,78.604 134.23,87.671 133.636,88.265 U2.43
"IMD ML": J1.6 R2.1 R6.2 | length 23.7
  Top Layer w0.254: R6.2@132.842,74.264 R6.2 132.969,73.152 v1(132.715,72.898) 131.572,71.755 128.651,71.755 128.27,71.374 128.27,68.199 132.08,64.389 R2.1 ; v1(136.144,73.279) 136.148,73.279 137.71,74.842 J1.6
  Bottom Layer w0.254: v1(132.715,72.898) 133.115,73.298 136.125,73.298 v1(136.144,73.279)
"IMD S": J1.8 R1.2 R8.2 | length 7.4
  Top Layer w0.254: R1.2 R8.2 132.334,69.184 132.994,68.523 137.395,68.523 J1.8
"IMD STAT": R8.1 R9.2 R10.1 U2.19 U2.46 | length 31.4
  Top Layer w0.254: R8.1 132.207,70.581 133.604,69.184 R9.2 ; R8.1@132.334,70.77 132.588,71.024 132.588,71.501 133.756,72.669 133.756,74.987 134.62,75.85 R10.1 134.855,75.85 135.109,76.104 135.109,88.813 135.136,88.84 U2.46 135.136,92.552 133.136,94.552 U2.19
LED0: DS1.2 U2.27 | length 21.2
  Top Layer w0.254: DS1.2 120.936,107.283 120.936,105.886 121.412,105.41 121.412,104.162 121.561,104.013 122.796,104.013 123.05,103.759 123.05,97.2 124.714,95.536 v1(124.714,95.504) ; v1(127.635,96.774) 127.694,96.715 127.694,95.993 128.397,95.29 U2.27
  Bottom Layer w0.254: v1(124.714,95.504) 126.238,95.504 127.508,96.774 v1(127.635,96.774)
LED1: DS2.2 U2.28 | length 18.1
  Top Layer w0.254: DS2.2 122.924,106.946 124.904,106.946 125.73,106.12 125.73,97.155 128.072,94.813 129.113,94.813 U2.28
NetD1_A: D1.A K1.9 Q1.S | length 19.3
  Top Layer w0.508: K1.9 115.824,56.261 121.028,56.261 121.575,56.808 126.436,56.808 D1.A 127.374,57.746 127.374,62.677 127.432,62.735 127.432,62.885 127.478,62.931 Q1.S
NetD1_K: D1.K D4.K | length 3.8
  Top Layer w0.508: D1.K D4.K
NetDS1_1: DS1.1 R16.1 | length 2
  Top Layer w0.254: DS1.1 120.142,105.06 120.396,104.806 R16.1
NetDS2_1: DS2.1 R17.1 | length 2
  Top Layer w0.254: DS2.1 122.111,106.236 122.111,104.997 R17.1@122.301,104.806
NetDS5_1: DS5.1 R25.1 | length 1.7
  Top Layer w0.254: R25.1 DS5.1
NetJ3_2: J3.2 R18.2 | length 8.9
  Top Layer w0.508: R18.2 117.717,61.621 119.267,60.071 122.428,60.071 124.333,61.976 J3.2
NetQ1_G: Q1.G R10.2 | length 13.3
  Top Layer w0.254: Q1.G 127.635,64.838 v1(127.635,67.056) ; v1(134.62,72.517) 134.62,74.137 R10.2
  Bottom Layer w0.254: v1(127.635,67.056) 129.159,67.056 v1(134.62,72.517)
NRST: C10.2 J2.10 R15.1 SW1.2 U2.7 | length 29.7
  Top Layer w0.254: J2.10 132.969,103.759 v1(134.62,103.759) ; U2.7 136.61,93.79 136.398,94.002 136.398,96.197 137.038,96.837 139.668,96.837 141.351,98.521 R15.1 141.605,98.648 141.605,99.283 141.63,99.308 142.076,99.308 C10.2@142.875,100.107 ; v1(137.668,103.759) 139.223,103.759 C10.2@142.875,100.107 ; SW1.2 145.452,100.107 C10.2 C10.2@142.875,100.107
  Bottom Layer w0.254: v1(134.62,103.759) v1(137.668,103.759)
"OSC IN": U2.5 U3.3 | length 4.6
  Top Layer w0.254: U2.5 137.659,92.767 138.411,92.767 139.607,91.572 140.589,91.572 140.589,90.837 140.337,90.585 U3.3
"PWR CB": C14.1 U7.1 | length 2.5
  Top Layer w0.254: U7.1 106.972,96.767 107.823,95.916 C14.1
"PWR FB": R23.1 R24.2 TP9.1 U7.3 | length 6.9
  Top Layer w0.254: U7.3 103.867,96.836 103.867,99.841 TP9.1 105.537,99.949 R24.2 R23.1
"PWR SW": C14.2 D3.K L1.1 U7.6
"SHDN IN": J6.4 K1.10 | length 18.3
  Top Layer w0.508: J6.4 106.38,63.927 110.871,59.436 115.189,59.436 K1.10
"SHDN OUT": J6.1 K1.6 | length 12.8
  Top Layer w0.508: J6.1 103.378,61.087 K1.6
SWCLK: J2.4 U2.37 | length 22.9
  Top Layer w0.254: U2.37 130.659,89.313 130.659,89.958 131.445,90.744 131.445,95.504 129.667,97.282 129.667,101.212 130.309,101.854 133.985,101.854 135.401,103.27 135.401,104.13 134.366,105.165 J2.4
SWDIO: J2.2 U2.34 | length 19.9
  Top Layer w0.254: v1(127.635,92.329) 127.708,92.329 128.224,91.813 129.113,91.813 U2.34 ; J2.2 135.89,105.918 v1(135.89,104.775)
  Bottom Layer w0.254: v1(127.635,92.329) 127.613,92.351 127.613,92.815 128.778,93.98 128.778,97.028 131.715,99.965 131.715,101.959 134.531,104.775 v1(135.89,104.775)
"USART1 RX": P1.2 U2.31 | length 15.8
  Top Layer w0.254: P1.2 123.456,104.533 123.456,97.867 128.009,93.313 129.113,93.313 U2.31
"USART1 TX": P1.1 U2.30 | length 11.7
  Top Layer w0.254: P1.1 124.587,97.536 128.31,93.813 129.113,93.813 U2.30
pads on no net: FID1.1 FID2.1 J1.7 J1.NC J2.6 J2.7 J2.8 J6.NC K1.1 K1.5 M1.1 M2.1 M3.1 M4.1 U2.2 U2.3 U2.4 U2.10 U2.11 U2.12 U2.13 U2.14 U2.15 U2.16 U2.17 U2.18 U2.20 U2.21 U2.22 U2.25 U2.26 U2.29 U2.38 U2.39 U2.40 U2.41 U2.42 U2.44

## Polygon pours and split planes (outlines as drawn)
no net on Bottom Overlay (solid): 99.695,90.551
GND on Top Layer "GND_L01_P007" (solid, pour order 7): 117.983,95.631 112.776,95.631 112.776,91.567 109.601,88.392 109.474,88.392 109.474,83.566 115.443,83.566 115.443,89.027 117.983,91.567
no net on Top Layer "NONET_L01_P004" (solid, pour order 4): 120.904,98.171
"PWR SW" on Top Layer "PWR_SW_L01_P002" (solid, pour order 2): 108.966,98.552 115.189,98.552 115.189,95.885 114.935,95.631 112.014,95.631 112.014,92.964 105.41,92.964 105.41,95.504 106.807,95.504 106.807,94.996 108.966,94.996
no net on Top Layer "NONET_L01_P000" (solid, pour order 0): 109.093,98.933
GND on Bottom Layer "Bottom Layer-GND" (solid, pour order 13): 99.069,109.093 98.171,109.093 95.25,106.172 95.25,54.61 98.933,50.927 146.177,50.927 146.177,51.181 149.098,54.102 149.098,105.41 145.161,109.347
GND on Bottom Layer "GND_L02_P006" (solid, pour order 6): 94.869,55.897 99.187,51 144.539,51 149.225,55.686 149.225,105.664 145.669,109 98.298,109 94.869,105.799
no net on Bottom Solder (solid): 125.73,80.772
no net on Top Solder (solid): 125.984,78.74

## Silkscreen, mask and mechanical layers (free items; w line width, h text height)
Top Overlay:
  lines w0.254: 101.981,98.425 107.188,98.425 107.95,97.663 107.95,97.028 ; 103.505,105.283 103.505,102.489 104.521,101.473 104.648,101.473 ; 115.824,106.553 117.221,106.553 117.348,106.553 117.983,105.918 ; 120.65,109.474 120.904,109.728 126.111,109.728 126.111,103.886 126.238,103.759 127.635,103.759 128.27,103.759 128.651,103.378 128.905,103.124 ; 143.256,101.092 143.256,101.6 143.764,102.108 147.32,102.108
Bottom Overlay:
  text "QUTMS - SHDN" at 101.219,76.581 h1.52 r270
  text "IMD - 2020" at 99.069,76.454 h1.52 r270
Mechanical 1:
  lines w0.254: 94.069,54.267 94.069,105.499 ; 94.069,55 ccw(c99.069,55) 99.069,50 ; 94.069,105 cw(c99.069,105) 99.069,110 ; 99.06,50 145.377,50 ; 99.06,110 145.796,110 ; 145,50 ccw(c145,55) 150,55 ; 145,110 cw(c145,105) 150,105 ; 149.987,105.791 150,54.623

## Text inside footprints (layer, text, board x,y; h text height)
K1: Top Overlay "G5V-1" at 115.824,55.626 h1.52 r180
U2: Top Overlay "STM32 / F042 / C6" at 135.731,96.256 h1.02 r180